# Altium PCB PCB_ControlBoard.PcbDoc
Units mil, origin at the board's own origin, x right, y up, seen from the top; angles counter-clockwise.
Board outline 2165.69 x 1220.79 mil, 3 copper layers (Top Layer, Mid-Layer 2, Bottom Layer); 18 components, 108 nets, 66 pads, 0 vias.
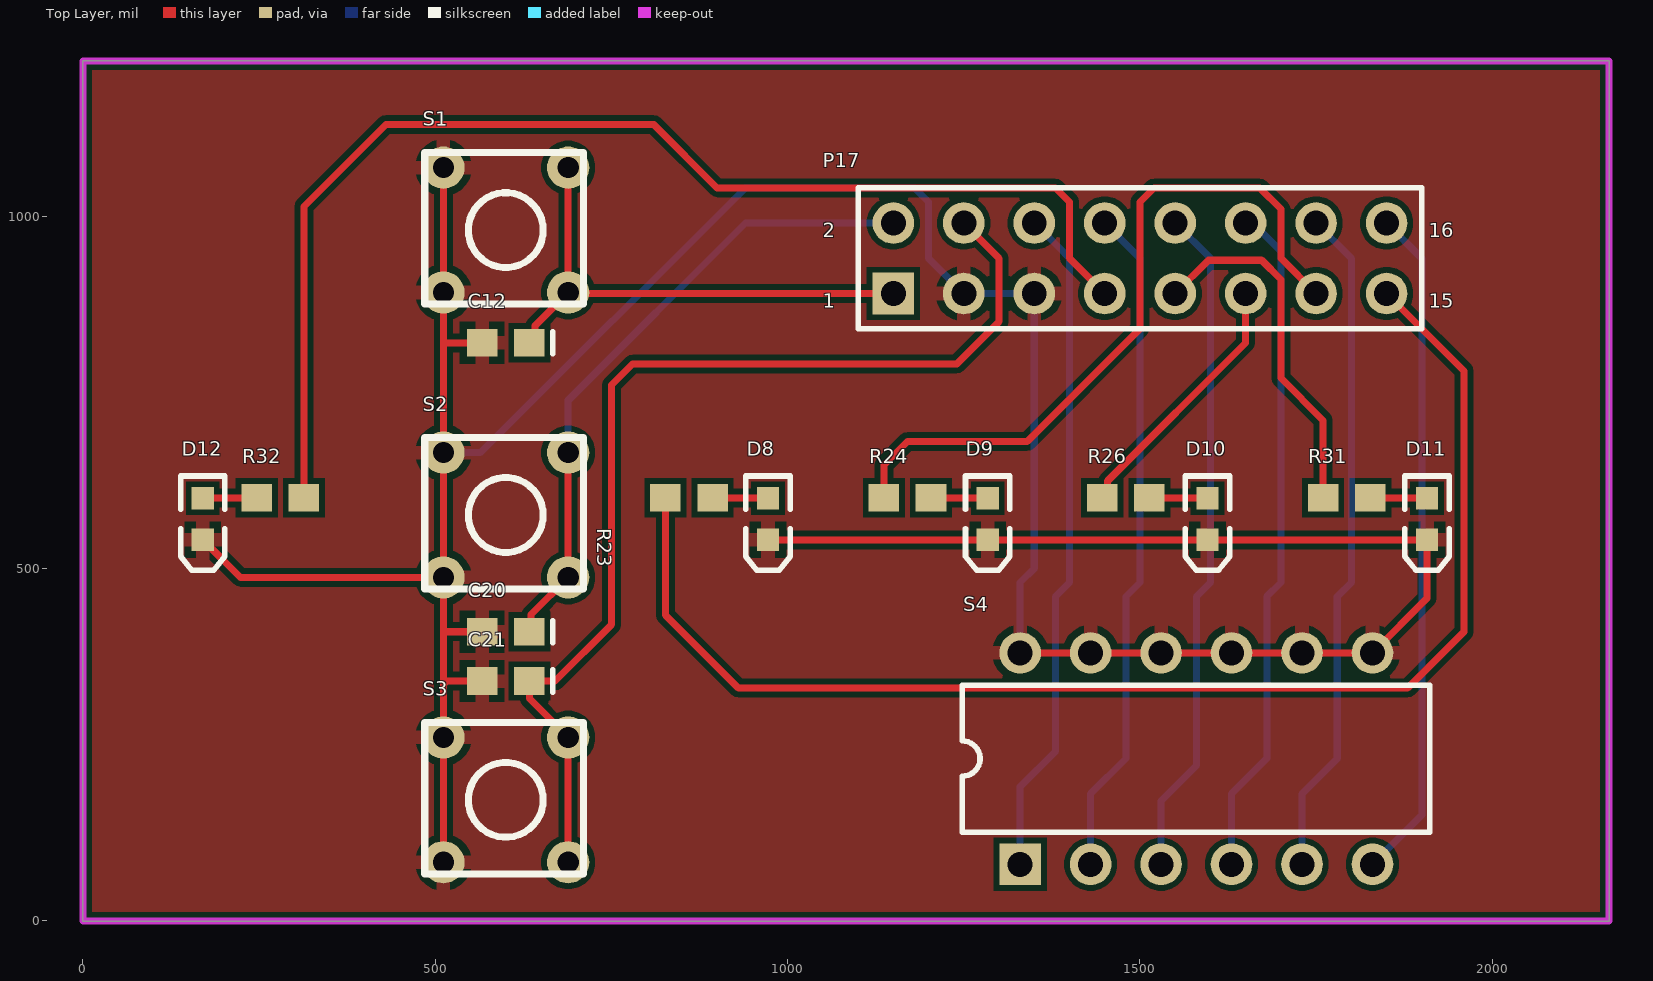
[diagram p0: Top Layer view]
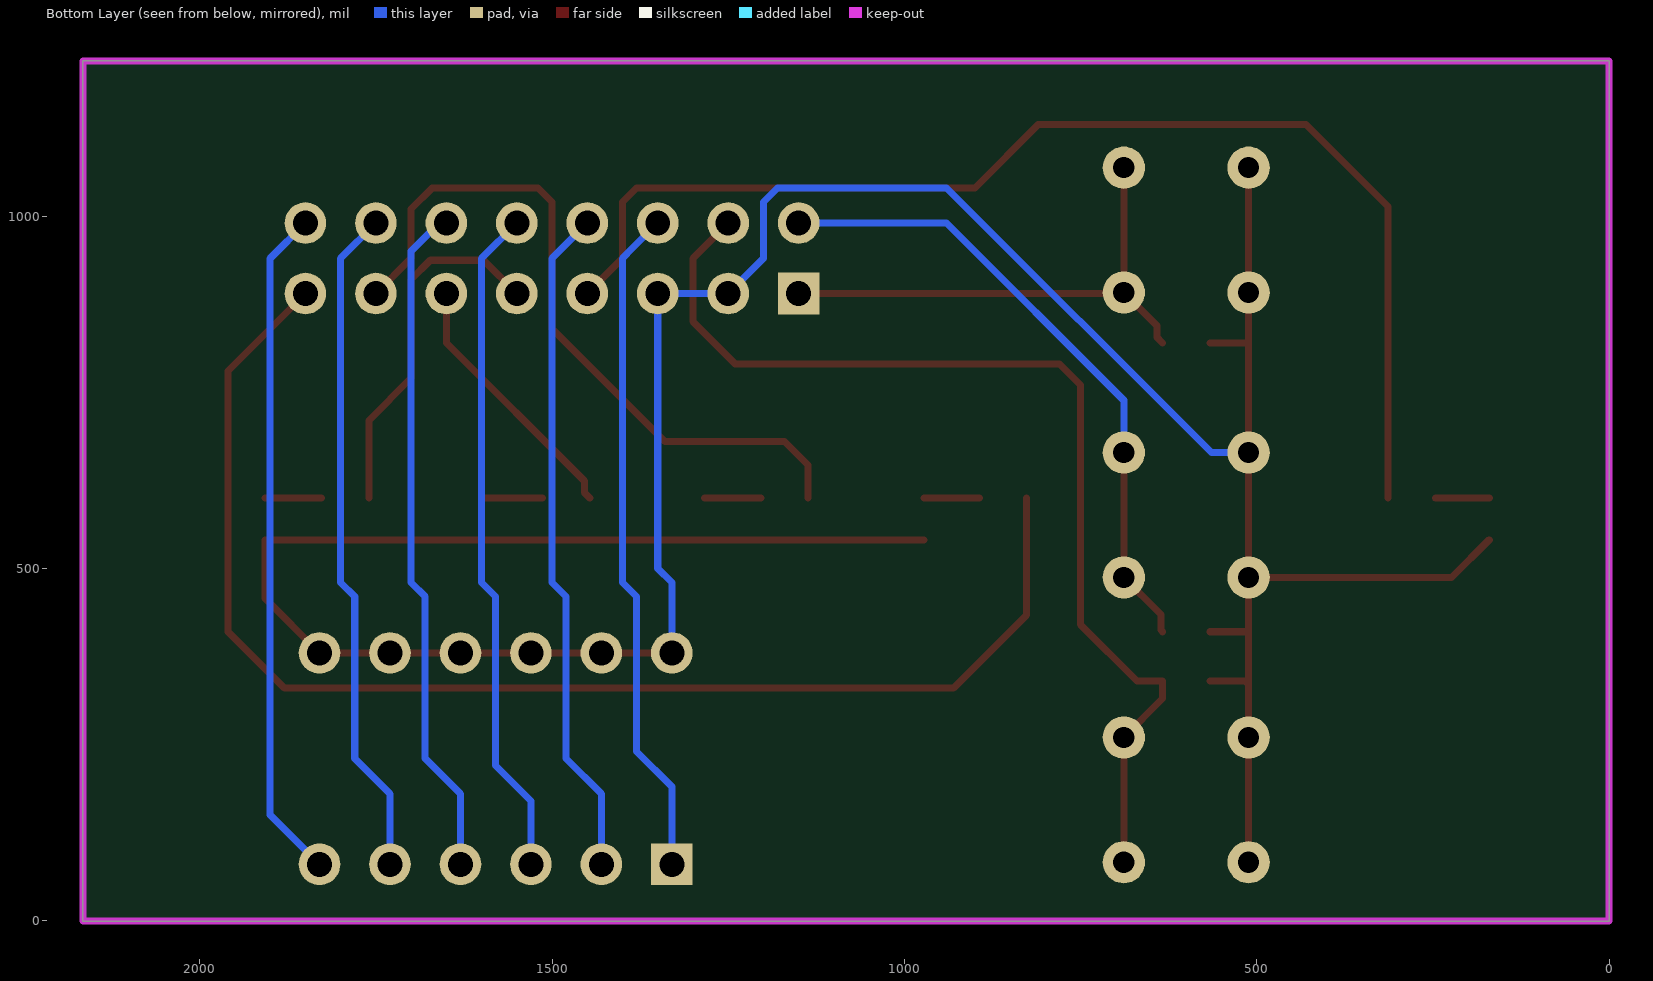
[diagram p1: Bottom Layer view, seen from below]

## Layer stack, top to bottom
Top Solder: solder mask 0.4, Solder Resist, Dk 3.5
Top Layer: signal copper 1.4
Dielectric 1: dielectric 12.6, FR-4, Dk 4.8
Mid-Layer 2: signal copper 1.4
Dielectric2: dielectric 12.6, FR-4, Dk 4.8
Bottom Layer: signal copper 1.4
Bottom Solder: solder mask 0.4, Solder Resist, Dk 3.5

## Board outline
0,-0.79 2165.69,-0.79 2165.69,1220 0,1220

## Design rules (kind name [scope] priority, off if disabled: settings)
BoardOutlineClearance [All] p1: gap=11.81 ignorepadtopadclearanceinfootprint=FALSE except(15.75: Arc-SplitBarrior Arc-SplitContinuation Track-SplitBarrior Track-SplitContinuation SMDPad-SplitBarrior SMDPad-SplitContinuation THPad-SplitBarrior THPad-SplitContinuation Via-SplitBarrior Via-SplitContinuation Fill-SplitBarrior Fill-SplitContinuation Poly-SplitBarrior Poly-SplitContinuation Region-SplitBarrior Region-SplitContinuation Text-SplitBarrior Text-SplitContinuation)
Clearance "Clearance Different Nets" [All] p1: gap=7.87 ignorepadtopadclearanceinfootprint=FALSE except(3.5: Arc-Arc Arc-Track Arc-SMDPad Track-Track Track-SMDPad; 5: SMDPad-SMDPad SMDPad-Via THPad-Via Via-Via; 10: Arc-Via Arc-Text Track-Via Track-Text SMDPad-Text THPad-Text Via-Text Fill-Text Poly-Text Region-Text Text-Text; 19.68: THPad-THPad Via-Hole)
Clearance "Clearance Same Nets" [All] p2: gap=7.87 ignorepadtopadclearanceinfootprint=FALSE except(3.5: Arc-Arc Arc-Track Arc-SMDPad Track-Track Track-SMDPad SMDPad-SMDPad; 5: SMDPad-Via THPad-Via; 10: Arc-Via Arc-Text Track-Via Track-Text SMDPad-Text THPad-Text Via-Via Via-Text Fill-Text Poly-Text Region-Text Text-Text)
Clearance "Clearance Bottom Layer" [OnLayer('Bottom Layer')] p3: gap=8 ignorepadtopadclearanceinfootprint=TRUE except(10: Arc-Text Track-Text SMDPad-Text THPad-Text Via-Text Fill-Text Poly-Text Region-Text Text-Text)
Clearance "Clearance Top Layer" [OnLayer('Top Layer')] p4: gap=8 ignorepadtopadclearanceinfootprint=TRUE except(10: Arc-Text Track-Text SMDPad-Text THPad-Text Via-Text Fill-Text Poly-Text Region-Text Text-Text)
HoleSize [All] p1: absolutevalues=TRUE maxlimit=248.03 minlimit=7.87 maxpercent=80.000 minpercent=20.000
MinimumAnnularRing [All] p1: minimumring=5.12
MinimumSolderMaskSliver [All] p1: minsoldermaskwidth=3.94
PolygonConnect PolygonConnect_1 [All] p1: thpad.connectstyle=Relief thpad.reliefconductorwidth=20 thpad.reliefentries=4 thpad.polygonreliefangle="90 Angle" thpad.airgapwidth=10 smdpad.connectstyle=Relief smdpad.reliefconductorwidth=20 smdpad.reliefentries=4 smdpad.polygonreliefangle="90 Angle" smdpad.airgapwidth=10 via.connectstyle=Direct via.reliefconductorwidth=20 via.reliefentries=4 via.polygonreliefangle="90 Angle" via.airgapwidth=10
RoutingCorners [All] p1: cornerstyle=Round minsetback=100 maxsetback=100
RoutingVias [All] p1: holewidth=19.68 width=39.37 viastyle="Through Hole" minholewidth=7.87 minwidth=13.78 maxholewidth=39.37 maxwidth=78.74
SilkToSilkClearance [All] p1: silktosilkclearance=3.94
SilkToSolderMaskClearance [IsPad] p1: minsilkscreentomaskgap=3.94 clearancetoexposedcopper=TRUE
SolderMaskExpansion [All] p1: expansion=4 istentingtop=FALSE
SupplyNets "Schematic Supply Nets_10" [InNet('GND1')] p1: voltage=0.000
SupplyNets "Schematic Supply Nets_9" [InNet('3V3')] p2: voltage=0.000
SupplyNets "Schematic Supply Nets_8" [InNet('L1')] p3: voltage=0.000
SupplyNets "Schematic Supply Nets_7" [InNet('+12_1')] p4: voltage=0.000
SupplyNets "Schematic Supply Nets_6" [InNet('GND')] p5: voltage=0.000
SupplyNets "Schematic Supply Nets_5" [InNet('L1IN')] p6: voltage=0.000
SupplyNets "Schematic Supply Nets_4" [InNet('GND2')] p7: voltage=0.000
SupplyNets "Schematic Supply Nets_3" [InNet('5V')] p8: voltage=0.000
SupplyNets "Schematic Supply Nets_2" [InNet('+3V3_1')] p9: voltage=0.000
SupplyNets "Schematic Supply Nets_1" [InNet('+12V')] p10: voltage=0.000
SupplyNets "Schematic Supply Nets" [InNet('12V')] p11: voltage=0.000
Width [All] p1: maxlimit=100 minlimit=3.5 preferedwidth=15
25 further rules are at their usual default settings.

## Components (designator, comment, footprint, x,y, rotation, side; value= is the part's Value field where it differs from the comment)
C12 "C0603" 0603 600,820 r180 top value=100nF
C20 "C0603" 0603 600,410 r180 top value=100nF
C21 "C0603" 0603 600,340 r180 top value=100nF
D8 "CH 1" 1.6X0.8X0.8 972.13,570 r270 top
D9 "CH 2" 1.6X0.8X0.8 1283.91,570 r270 top
D10 "CH 3" 1.6X0.8X0.8 1595.7,570 r270 top
D11 "CH 4" 1.6X0.8X0.8 1907.49,570 r270 top
D12 "LEARN" 1.6X0.8X0.8 170,570 r270 top
P17 "Header 8X2" HDR2X8 1150,890 r0 top
R23 "2K2" ERA-0603 860,600 r0 top
R24 "2K2" ERA-0603 1170,600 r0 top
R26 "2K2" ERA-0603 1480,600 r0 top
R31 "2K2" ERA-0603 1793.46,600 r0 top
R32 "2K2" ERA-0603 280,600 r180 top
S1 "UP" TACTILE_SWITCH 600,980 r180 top
S2 "<OK >" TACTILE_SWITCH 600,575.71 r180 top
S3 "DOWN" TACTILE_SWITCH 600,171.42 r180 top
S4 "SW DIP-6" DIP-12/SW 1580,230 r0 top

## Footprints (in the part's own frame and the unit in brackets; to place one, negate y for a bottom-side part, rotate by r counter-clockwise, add the part's x,y. Pads: shape width x height; smd on the part's side, far side on the other; paste and mask are expansions set on the pad)
1.6X0.8X0.8 [mm] "SM LED; 2 Flat Leads"
  rect 0.8x0.8 smd: 1(-0.75,0) 2(0.75,0)
  silkscreen extent -1.55,-0.8 1.85,0.8
0603 [mm] "Chip Capacitor; Body 1.6 x 0.8 mm (LxW typ)"
  rect 1.1x1 smd: 1(-0.85,0) 2(0.85,0)
  silkscreen extent -1.7,-0.4 -1.7,0.4
DIP-12/SW [mm] "DIP Switch; 12 Leads"
  rect 1.5x1.5 hole 0.9: 1(-6.35,-3.81)
  round 1.5 hole 0.9: 2(-3.81,-3.81) 3(-1.27,-3.81) 4(1.27,-3.81) 5(3.81,-3.81) 6(6.35,-3.81) 7(6.35,3.81) 8(3.81,3.81) 9(1.27,3.81) 10(-1.27,3.81) 11(-3.81,3.81) 12(-6.35,3.81)
  silkscreen extent -8.43,-2.65 8.41,2.65
ERA-0603 [mm] "Chip Resistor; Body 1.6 x 0.8 mm (LxW typ)"
  rect 1.1x1 smd: 1(-0.85,0) 2(0.85,0)
HDR2X8 [mm] "Connector; Header; 8x2 Position"
  rect 1.5x1.5 hole 0.9: 1(0,0)
  round 1.5 hole 0.9: 2(0,2.54) 3(2.54,0) 4(2.54,2.54) 5(5.08,0) 6(5.08,2.54) 7(7.62,0) 8(7.62,2.54) 9(10.16,0) 10(10.16,2.54) 11(12.7,0) 12(12.7,2.54) 13(15.24,0) 14(15.24,2.54) 15(17.78,0) 16(17.78,2.54)
  silkscreen extent -1.27,-1.27 19.05,3.81
TACTILE_SWITCH [mil] "PCB push button"
  round 60 hole 30: 1(-88.58,88.58) 2(88.58,88.58) 3(88.58,-88.58) 4(-88.58,-88.58)
  silkscreen extent -110,-110 115,105

## Part data
C12 C20 C21: "Ceramic Chip Capacitor - Standard", PackageDocument=Mar-2001, Code_IPC="1608 [0603]", Code_JEITA=0603, ComponentLink1Description="Manufacturer Link", ComponentLink1URL=http://www.kemet.com/, ComponentLink2Description=Datasheet, ComponentLink2URL=http://www.kemet.com/kemet/web/homepage/kechome.nsf/vapubfilesname/F3102TA.pdf/$file/F3102TA.pdf, DatasheetDocument=Mar-2001, LatestRevisionDate=19-Mar-2004, LatestRevisionNote="Silkscreen size reduced.", Note="Footprint corresponds to dimensions for bulk cassette packaging. This case size has tightened tolerances.", PackageReference=0603, Published=17-Jul-2002, Publisher="Altium Limited"
D8 D9 D10 D11 D12: library part HSMZ-C190, "High Performance Chip LED, Red", LED_Colour=Red, PackageDocument=11-Mar-2002, ComponentLink1Description="Manufacturer Link", ComponentLink1URL=http://www.agilent.com/, ComponentLink2Description=Datasheet, ComponentLink2URL=http://cp.literature.agilent.com/litweb/pdf/5988-5891EN.pdf, DatasheetDocument=11-Mar-2002, LuminousIntensity="40mcd (Minimum).", PackageReference=1.6X0.8X0.8, PCB_Layout="Complies with manufacturer's recommendation.", Published=11-Dec-2002, Publisher="Altium Limited"
P17: "Header, 8-Pin, Dual row", LatestRevisionDate=17-Jul-2002, LatestRevisionNote="Re-released for DXP Platform.", Publisher="Altium Limited"
R23 R24 R26 R31 R32: library part ERA3Y, "Rectangular Thick Film Chip Resistor, 10 Ohm to 330k Ohm Range, 0.1% and 0.5% Tolerance, 0603 Size, 0.063 W", PackageDocument=Mar-2003, Code_IPC="1608 [0603]", ComponentLink1Description="Manufacturer Link", ComponentLink1URL=http://www.panasonic.com/industrial/components/resistive_products.htm, ComponentLink2Description=Datasheet, ComponentLink2URL=http://www.panasonic.com/industrial/components/pdf/AOA0000CE8.pdf, LatestRevisionDate=19-Mar-2004, LatestRevisionNote="Silkscreen size reduced.", Note="If flow soldering, adjust pad width of PCB Footprint to 0.7 - 0.8 times the width of the resistor.", PackageReference=ERA-0603, Published=17-Dec-2003, Publisher="Altium Limited"
S1 S2 S3: library part TACKTILE_SWITCH
S4: "DIP Switch, 6 Position, SPST", LatestRevisionDate=17-Jul-2002, LatestRevisionNote="Re-released for DXP Platform.", PackageDescription="DIP Switch; 12 Leads", PackageReference=DIP-12/SW, Published=24-Mar-1999, Publisher="Altium Limited"

## Nets (pads, with @x,y where several pads share a name; then routed paths per layer and width w, separated by ;. In a path a pad name is that pad's centre, name@x,y a point inside that pad or via, vN(x,y) a via of type N, cw(c..) or ccw(c..) an arc to the next point about the centre after c; other vN are vias at no path point)
3V3: 
5V: 
12V: 
+3V3_1: 
+12_1: 
+12V: 
ADDRESS_0: 
ADDRESS_1: 
ADDRESS_2: 
ADDRESS_3: 
ADDRESS_4: 
ADDRESS_5: 
BUTTON_DOWN: 
BUTTON_OK: 
BUTTON_UP: 
CURRENT: 
DIM1: 
DIM2: 
DIM3: 
DIM4: 
GATE: 
GND: 
GND1: 
GND2: 
I2C1_SCL: 
I2C1_SDA: 
L1: 
L1IN: 
LED_CH1: 
LED_CH2: 
LED_CH3: 
LED_CH4: 
LED_LEARN: 
LIVE1: 
LIVE2: 
LIVE3: 
LIVE4: 
N1: 
NetC1_1: 
NetC1_2: 
NetC10_2: 
NetC12_1: C12.1 P17.1 S1.1 S1.4 | length 733.4
  Top Layer w10: C12.1 641.4,827.93 641.4,844.23 S1.1 ; S1.4 S1.1 ; P17.1 690,890 S1.1
NetC12_2: C12.2 C20.2 C21.2 D8.2 D9.2 D10.2 D11.2 D12.2 P17.3 P17.5 S1.2 S1.3 S2.2 S2.3 S3.2 S3.3 S4.7 S4.8 S4.9 S4.10 S4.11 S4.12 | length 4766.1
  Top Layer w10: D12.2 223.35,487.13 S2.2 ; S3.2 S3.3 511.42,335 ; S1.3 S1.2 511.42,820 ; C21.2 516.42,340 511.42,335 ; C20.2 511.42,410 ; C12.2 511.42,820 ; D8.2 D9.2 D10.2 D11.2 1907.49,457.49 S4.7 S4.8 S4.9 S4.10 S4.11 S4.12 ; 511.42,335 511.42,410 ; 511.42,410 S2.2 ; S2.2 S2.3 511.42,820
  Bottom Layer w10: S2.3 564.29,664.29 940,1040 1180,1040 1200,1020 1200,940 P17.3 P17.5 1350,500 1330,480 S4.12
NetC13_2: 
NetC18_2: 
NetC20_1: C20.1 P17.2 S2.1 S2.4 | length 919
  Top Layer w10: C20.1 635.69,412.22 635.69,434.23 S2.1 S2.4 S2.4@690,665.71
  Bottom Layer w10: S2.4 688.58,738.58 940,990 P17.2
NetC21_1: C21.1 P17.4 S3.1 S3.4 | length 1517.7
  Top Layer w10: S3.1 S3.4 633.46,315.12 C21.1 670,340 750,420 750,760 780,790 1240,790 1300,850 1300,940 P17.4
NetC27_1: 
NetC29_1: 
NetC29_2: 
NetD1_2: 
NetD2_2: 
NetD3_2: 
NetD7_2: 
NetD8_1: D8.1 R23.2 | length 78.9
  Top Layer w10: R23.2 971.65,600 D8.1
NetD9_1: D9.1 R24.2 | length 80.6
  Top Layer w10: R24.2 1283.44,600 D9.1
NetD10_1: D10.1 R26.2 | length 82.4
  Top Layer w10: R26.2 1595.23,600 D10.1
NetD11_1: D11.1 R31.2 | length 80.8
  Top Layer w10: R31.2 1907.02,600 D11.1
NetD12_1: D12.1 R32.2 | length 76.7
  Top Layer w10: D12.1 246.06,599.53 R32.2
NetP17_6: P17.6 S4.1 | length 959.7
  Bottom Layer w10: S4.1 1330,190 1380,240 1380,460 1400,480 1400,940 1385.62,954.38 P17.6
NetP17_7: P17.7 R32.1 | length 1744.5
  Top Layer w10: R32.1 313.46,1013.46 430,1130 810,1130 900,1040 1380,1040 1400,1020 1400,940 P17.7
NetP17_8: P17.8 S4.2 | length 959.7
  Bottom Layer w10: S4.2 1430,180 1480,230 1480,460 1500,480 1500,940 P17.8
NetP17_9: P17.9 R31.1 | length 515.7
  Top Layer w10: P17.9 1597.2,937.2 1672.8,937.2 1700,910 1700,770 1760,710 R31.1
NetP17_10: P17.10 S4.3 | length 959.7
  Bottom Layer w10: S4.3 1530,170 1580,220 1580,460 1600,480 1600,940 P17.10
NetP17_11: P17.11 R26.1 | length 374.3
  Top Layer w10: R26.1 1454.23,607.7 1454.23,624.23 1650,820 P17.11
NetP17_12: P17.12 S4.4 | length 965.6
  Bottom Layer w10: S4.4 1630,180 1680,230 1680,460 1700,480 1700,950 1660,990 P17.12
NetP17_13: P17.13 R24.1 | length 1031.6
  Top Layer w10: R24.1 1136.54,646.54 1170,680 1340,680 1500,840 1500,1020 1520,1040 1670,1040 1700,1010 1700,940 P17.13
NetP17_14: P17.14 S4.5 | length 959.7
  Bottom Layer w10: S4.5 1730,180 1780,230 1780,460 1800,480 1800,940 P17.14
NetP17_15: P17.15 R23.1 | length 1901.6
  Top Layer w10: R23.1 826.54,433.46 930,330 1880,330 1960,410 1960,780 P17.15
NetP17_16: P17.16 S4.6 | length 959.7
  Bottom Layer w10: S4.6 1900,150 1900,940 P17.16
NetP19_1: 
NetP19_2: 
NetQ1_1: 
NetR2_1: 
NetR3_1: 
NetR4_1: 
NetR7_2: 
NetR8_2: 
NetR10_2: 
NetR11_2: 
NetR15_2: 
NetR19_1: 
NetR22_2: 
NetR27_2: 
NetR28_2: 
NetR29_2: 
NetR33_1: 
NetU1_1: 
NEUTRAL1: 
NEUTRAL2: 
NEUTRAL3: 
NEUTRAL4: 
NTC: 
OUT1: 
RX: 
RX2: 
SWCLK: 
SWCLK1: 
SWDIO: 
SWDIO1: 
TX: 
TX2: 
USART1_DE: 
USART1_RX: 
USART1_TX: 
USART_RX: 
USART_TX: 
ZEROCROSS: 

## Polygon pours and split planes (outlines as drawn)
NetC12_2 on Top Layer "NETC12_2_L01_P000" (solid, remove dead copper, pour order 0): 0,1220 2160,1220 2160,0 0,0

## Keep-outs
Keep-Out Layer:
  lines w10: 0,-0.79 2165.69,-0.79 2165.69,1220 0,1220 0,0

## Text inside footprints (layer, text, board x,y; h text height)
P17: Top Overlay "2" at 1050,970 h20; Top Overlay "1" at 1050,870 h20; Top Overlay "15" at 1910,870 h20; Top Overlay "16" at 1910,970 h20